# EAGLE board TCC (EAGLE 9.7.0)

Size 113.06 x 91.32 mm. Coordinates in mm from the lower left corner, seen from the top.
Outline: 0,0 113.06,0 113.06,91.32 0,91.32 0,0
Copper layers (1*16): Top 0.035mm / dielectric 1.5mm / Bottom 0.035mm
Design rules "default": minimum track width 6mil, minimum drill 0.35mm, track to track 6mil, track to pad 6mil, pad to pad 6mil, via to via 6mil, smd to smd 6mil, copper to edge 40mil, drill to drill 6mil, minimum pad ring 10mil, minimum via ring 8mil, stop-mask expansion 4mil, vias tented up to drill 0mil, thermal gap 10mil

## Footprints (pad centres in the part's own frame; a part is rotated, then mirrored left to right if it is on the bottom)
RESAD1016W63L850D250B = drill 0.83 pad 1.43: 1 -5.08,0; 2 5.08,0
GL5528 = drill 0.8 pad 1.4: 1 -1.702,0; 2 1.702,0
SEN-13322 = drill 1.016 long: 1 -2.54,0; 2 0,0; 3 2.54,0
TO92 = drill 0.813 octagon: 1 -1.27,0; 2 0,1.905; 3 1.27,0
ARDUINO-UNO-R3-SHIELD = drill 1.016 pad 1.88: 3.3V 24.13,-2.54; 5V 24.13,0; A0 24.13,12.7; A1 24.13,15.24; A2 24.13,17.78; A3 24.13,20.32; A4 24.13,22.86; A5 24.13,25.4; AREF -24.13,-13.97; D2 -24.13,20.32; D3 -24.13,17.78; D4 -24.13,15.24; D5 -24.13,12.7; D6 -24.13,10.16; D7 -24.13,7.62; D8 -24.13,3.81; D9 -24.13,1.27; D10 -24.13,-1.27; D11 -24.13,-3.81; D12 -24.13,-6.35; D13 -24.13,-8.89; GND@0 24.13,2.54; GND@1 24.13,5.08; GND@2 -24.13,-11.43; IOREF 24.13,-7.62; NC 24.13,-10.16; RES 24.13,-5.08; RX -24.13,25.4; SCL -24.13,-19.05; SDA -24.13,-16.51; TX -24.13,22.86; VIN 24.13,7.62

## Placement (x,y rotation side)
R2  10k  [RESAD1016W63L850D250B]  58.05,12.7 0 top
R4  PHOTOCELL_GL5528  [GL5528]  64.4,10.16 180 top
SEN1  SEN-13322  [SEN-13322]  106.07,6.35 180 top
U1  TMP36GT9Z_TO92  [TO92]  78.37,12.7 180 top
U2  ARDUINO-UNO-R3-SHIELD  [ARDUINO-UNO-R3-SHIELD]  47.88,61.47 270 top

## Library data of the parts
R2 R4 SEN1 U1 U2 = Tinkercad

## Nets
U1_+VS: R4.1 SEN1.1 U1.3
U1_GND: R2.1 SEN1.2 U1.1
U2_A0: SEN1.3 U2.A0
U2_A1: R2.2 R4.2 U2.A1
U2_A2: U1.2 U2.A2

## Tracks (layer width: path | path; a pad name or v marks a point on that pad's centre or on a via)
U1_+VS  (2 unrouted)
U1_GND  (2 unrouted)
U2_A0  (1 unrouted)
U2_A1  (2 unrouted)
U2_A2  (1 unrouted)